# Altium PCB PCB2.PcbDoc
Units mil, origin at the board's own origin, x right, y up, seen from the top; angles counter-clockwise.
Board outline 2400 x 1920 mil, 2 copper layers (Top Layer, Bottom Layer); 11 components, 11 nets, 68 pads, 0 vias.
Unrouted connection lines stored in the file: 16.
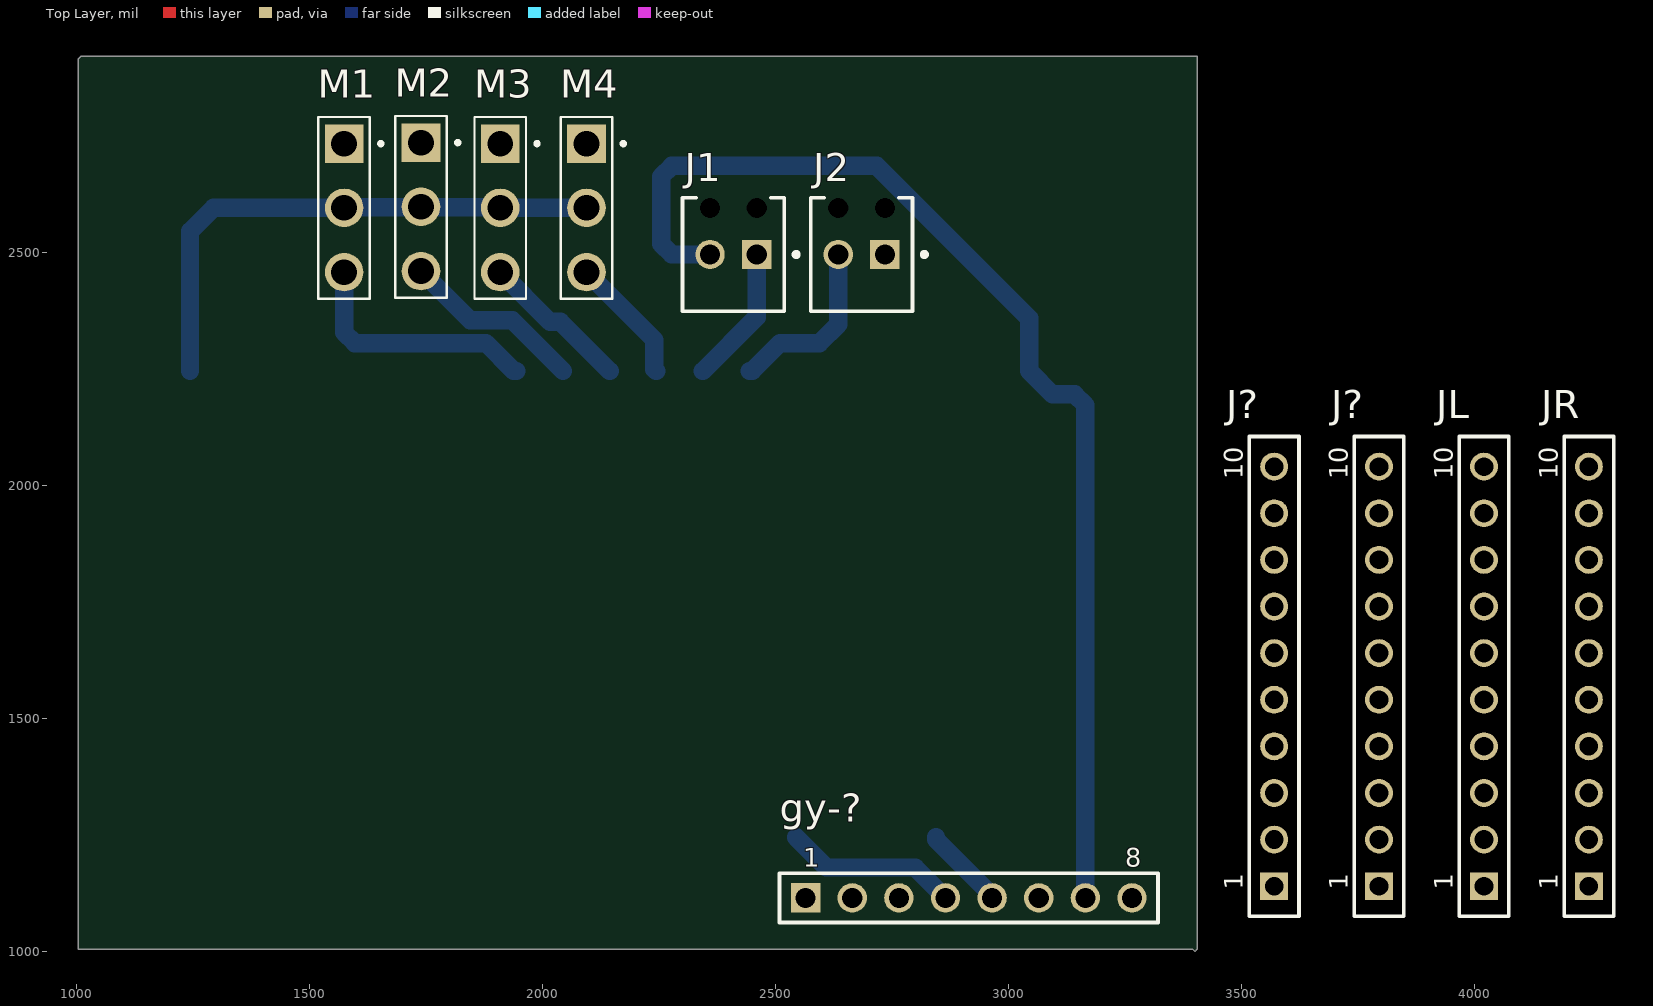
[diagram p0: Top Layer view]
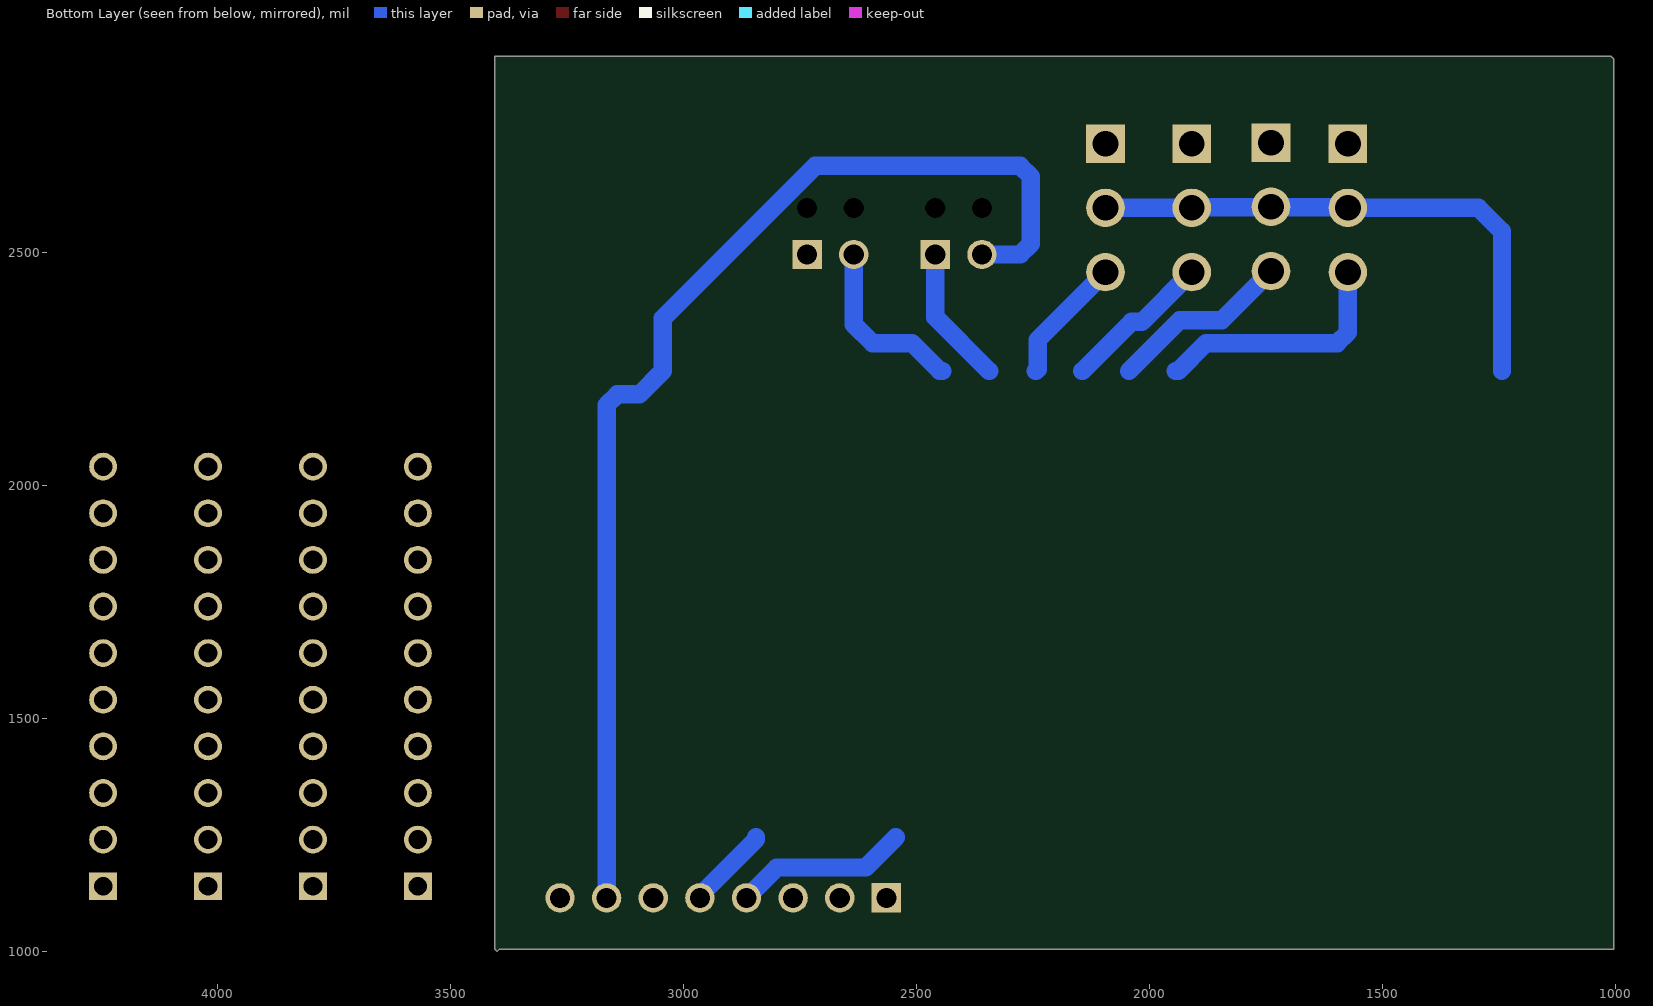
[diagram p1: Bottom Layer view, seen from below]

## Layer stack, top to bottom
Top Solder: solder mask 0.4, Solder Resist, Dk 3.5
Top Layer: signal copper 1.4
Dielectric 1: dielectric 12.6, FR-4, Dk 4.8
Bottom Layer: signal copper 1.4
Bottom Solder: solder mask 0.4, Solder Resist, Dk 3.5

## Board outline
3405,2920 3405,1005 3400,1000 3395,1005 1005,1005 1005,2915 1010,2920 1005,2915 1010,2920

## Design rules (kind name [scope] priority, off if disabled: settings)
Clearance [All] p1: gap=10 ignorepadtopadclearanceinfootprint=FALSE except(0: Arc-Hole Track-Hole SMDPad-Hole THPad-Hole Via-Hole Fill-Hole Poly-Hole Region-Hole Text-Hole)
PolygonConnect [All] p1: connectstyle=Relief reliefconductorwidth=30 reliefentries=4 polygonreliefangle="90 Angle" airgapwidth=30
RoutingVias [All] p1: holewidth=28 width=50 viastyle="Through Hole" minholewidth=28 minwidth=50 maxholewidth=28 maxwidth=50
SolderMaskExpansion [All] p1: expansion=4 istentingtop=FALSE
Width [All] p1: maxlimit=39.37 minlimit=39.37 preferedwidth=39.37 minimp=50.000000 maximp=50.000000 favimp=50.000000
30 further rules are at their usual default settings.

## Classes and differential pairs
component class ESP_Print1: gy-? J1 J2 J? JL JR M1 M2 M3 M4

## Components (designator, comment, footprint, x,y, rotation, side; value= is the part's Value field where it differs from the comment)
gy-? "61300811121" 61300811121 2915,1115 r0 top
J1 "1725656" PHOE-1725656-2 2410,2495 r180 top
J2 "1725656" PHOE-1725656-2 2685,2495 r180 top
J? "61301011821" 61301011821 3570,1590 r90 top
J? "" 61301011821 3795,1590 r90 top
JL "" 61301011821 4020,1590 r90 top
JR "61301011821" 61301011821 4245,1590 r90 top
M1 "" TE_1986717-3 1575,2595 r270 top
M2 "" TE_1986717-3 1740,2597.2 r270 top
M3 "" TE_1986717-3 1910,2595 r270 top
M4 "" TE_1986717-3 2095,2595 r270 top

## Footprints (in the part's own frame and the unit in brackets; to place one, negate y for a bottom-side part, rotate by r counter-clockwise, add the part's x,y. Pads: shape width x height; smd on the part's side, far side on the other; paste and mask are expansions set on the pad)
61300811121 [mm] "Pin Header, pitch 2.54 mm, THT, Vertical, single row, 8p"
  rect 1.6x1.6 hole 1.1: 1(-8.89,0)
  round 1.6 hole 1.1: 2(-6.35,0) 3(-3.81,0) 4(-1.27,0) 5(1.27,0) 6(3.81,0) 7(6.35,0) 8(8.89,0)
  silkscreen extent -10.31,-1.35 10.31,1.35, body extent -10.16,-1.27 10.16,1.27, height 8.57
61301011821 [mm] "Socket Header, Pitch 2.54 mm, THT, Vertical, single row, 10p"
  rect 1.52x1.52 hole 1.02: 1(-11.43,0)
  round 1.52 hole 1.02: 2(-8.89,0) 3(-6.35,0) 4(-3.81,0) 5(-1.27,0) 6(1.27,0) 7(3.81,0) 8(6.35,0) 9(8.89,0) 10(11.43,0)
  silkscreen extent -13.08,-1.35 13.08,1.35, body extent -12.95,-1.25 12.95,1.25, height 8.55
PHOE-1725656-2 [mm] "Connector, 2-Leads, Body 6.2x5.4mm, Pitch 2.54mm"
  rect 1.6x1.6 hole 1.1: 1(-1.27,0)
  round 1.6 hole 1.1: 2(1.27,0)
  round 0 hole 1.1 unplated: MH1(-1.27,-2.54) MH2(1.27,-2.54)
  silkscreen extent -3.55,-3.1 2.77,3.1, body extent -2.77,-3.1 2.77,3.1, height 9
TE_1986717-3 [mm]
  rect 2.1x2.1 hole 1.4: 1(-3.5,0)
  round 2.1 hole 1.4: 2(0,0) 3(3.5,0)
  silkscreen extent -4.95,-1.4 4.95,2.1

## Part data
gy-?: library part CMP-1502-01076-1, "THT Vertical Pin Header WR-PHD, Pitch 2.54 mm, Single Row, 8 pins", Contact Resistance=20mOhm, Manufacturer="Wurth Elektronik", Operating Temperature=-40to105degC, Rated Current=3A, Withstanding Voltage=500VAC, Working Voltage=250VAC, Datasheet URL=https://katalog.we-online.de/em/datasheet/6130xx11121.pdf, Gender=Male, Manufacturer URL=http://www.we-online.de, Mounting Technology=THT, Orientation=Vertical, Package Reference=61300811121, Packaging=Bag, Part Number=61300811121, Pin Number=8, Pitch=2.54mm, Publisher=WurthElektronik, Row Number=Single
J1 J2: library part CMP-2000-05299-1, "Male Header, Pitch 2.54 mm, 1 x 2 Position, Height 9 mm, Tail Length 3.5 mm", Colour=Green, Manufacturer="Phoenix Contact", Content=250pc(s), Datasheet URL=http://datasheet.octopart.com/1725656-Phoenix-Contact-datasheet-5302866.pdf, Datasheet Version=Apr-08, Industrial packaging=Yes, Manufacturer part No.=1725656, Manufacturer URL=http://www.phoenixcontact.com/, Number of contacts=2, Pitch=2.54mm, Type=MPT0,5/2-2,54
J? JR: library part CMP-1502-01332-1, "THT Vertical Socket Header WR-PHD, Pitch 2.54 mm, Single Row, 10 pins", Contact Resistance=20mOhm, Manufacturer="Wurth Elektronik", Operating Temperature=-40to125degC, Rated Current=3A, Withstanding Voltage=500VAC, Working Voltage=250VAC, Datasheet URL=https://katalog.we-online.de/em/datasheet/6130xx11821.pdf, Gender=Female, Manufacturer URL=http://www.we-online.de, Mounting Technology=THT, Orientation=Vertical, Package Reference=61301011821, Packaging=Tray, Part Number=61301011821, Pin Number=10, Pitch=2.54mm, Publisher=WurthElektronik, Row Number=Single
J? JL: library part CMP-1502-01332-1, "THT Vertical Socket Header WR-PHD, Pitch 2.54 mm, Single Row, 10 pins", Contact Resistance=20mOhm, Manufacturer="Wurth Elektronik", Operating Temperature=-40to125degC, Package Reference=61301011821, Rated Current=3A, Withstanding Voltage=500VAC, Working Voltage=250VAC, Datasheet URL=https://katalog.we-online.de/em/datasheet/6130xx11821.pdf, Gender=Female, Manufacturer URL=http://www.we-online.de, Mounting Technology=THT, Orientation=Vertical, Packaging=Tray, Part Number=61301011821, Pin Number=10, Pitch=2.54mm, Publisher=WurthElektronik, Row Number=Single
M1 M2 M3 M4: library part 1986717-3, "3 Position Terminal Block Header, Male Pins, Unshrouded 0.138 _3.50mm_ Vertical Through Hole", Package=None, Availability=Unavailable, Centerline_Pitch="3.5 mm[.138 in]", MF="TE Connectivity", MP=1986717-3, Number_of_Positions=3, Price=None, SnapEDA_Link=https://www.snapeda.com/parts/1986717-3/TE%20Connectivity%20AMP%20Connectors/view-part/479222/?ref=snap, TE_purchase_URL=https://www.te.com/usa-en/product-1986717-3.html?te_bu=Cor&te_type=disp&te_campaign=seda_glo_cor-seda-global-disp-prtnr-fy19-seda-model-bom-cta_sma-317_1&elqCampaignId=32493

## Nets (pads, with @x,y where several pads share a name; then routed paths per layer and width w, separated by ;. In a path a pad name is that pad's centre, name@x,y a point inside that pad or via, vN(x,y) a via of type N, cw(c..) or ccw(c..) an arc to the next point about the centre after c; other vN are vias at no path point)
3.3: gy-?.7 J1.2 JL.1 | length 2513.6
  Bottom Layer w39.37: J1.2 2278.06,2495 2255,2518.06 2255,2661.94 2278.06,2685 2717.6,2685 3044.61,2358 3044.61,2245 3094.61,2195 3141.94,2195 3165,2171.94 gy-?.7
+5: J?.10@3570,2040 M1.2 M2.2 M3.2 M4.2 | length 1172.7
  Bottom Layer w39.37: 1244.61,2245 1244.61,2544.61 1295,2595 M1.2 1576.1,2596.1 1738.9,2596.1 M2.2 1741.1,2596.1 1908.9,2596.1 M3.2 M4.2
ECHO: J2.2 JL.7 | length 381.8
  Bottom Layer w39.37: 2444.61,2245 2450.25,2245 2510.06,2304.8 2594.8,2304.8 2635,2345 J2.2
GND: gy-?.6 J2.1 JR.10 M1.1 M2.1 M3.1 M4.1
PWM1: J?.2@3570,1240 M1.3 | length 533.3
  Bottom Layer w39.37: M1.3 1575,2327.87 1598.06,2304.8 1879.16,2304.8 1938.96,2245 1944.61,2245
PWM2: J?.1@3570,1140 M2.3 | length 393.4
  Bottom Layer w39.37: M2.3 1845.24,2354.17 1935.43,2354.17 2044.61,2245
PWM3: JL.10 M3.3 | length 322.5
  Bottom Layer w39.37: M3.3 2016.84,2350.37 2039.24,2350.37 2144.61,2245
PWM4: JL.9 M4.3 | length 274.2
  Bottom Layer w39.37: M4.3 2240.61,2311.59 2240.61,2248.99 2244.61,2245
SCL: gy-?.5 JR.8 | length 179.9
  Bottom Layer w39.37: 2844.61,1245 2844.61,1240.2 2965,1119.8 gy-?.5
SDA: gy-?.4 JR.5 | length 374.2
  Bottom Layer w39.37: 2544.61,1245 2609.34,1180.26 2799.74,1180.26 gy-?.4
TRIG: J1.1 JL.8 | length 297.8
  Bottom Layer w39.37: 2344.61,2245 2460,2360.39 J1.1
pads on no net: gy-?.1 gy-?.2 gy-?.3 gy-?.8 J1.MH1 J1.MH2 J2.MH1 J2.MH2 J?.1@3795,1140 J?.2@3795,1240 J?.3 J?.4 J?.5 J?.6 J?.7 J?.8 J?.9 J?.10@3795,2040 JL.2 JL.3 JL.4 JL.5 JL.6 JR.1 JR.2 JR.3 JR.4 JR.6 JR.7 JR.9

## Text inside footprints (layer, text, board x,y; h text height)
gy-?: Top Overlay "8" at 3250.04,1181.93 h40; Top Overlay "1" at 2560.28,1181.93 h40
J?: Top Overlay "1" at 3728.07,1132.52 h40 r90; Top Overlay "10" at 3728.07,2013.23 h40 r90
J?: Top Overlay "1" at 3503.07,1132.52 h40 r90; Top Overlay "10" at 3503.07,2013.23 h40 r90
JL: Top Overlay "1" at 3953.07,1132.52 h40 r90; Top Overlay "10" at 3953.07,2013.23 h40 r90
JR: Top Overlay "1" at 4178.07,1132.52 h40 r90; Top Overlay "10" at 4178.07,2013.23 h40 r90